# Altium PCB HomeController.PcbDoc (part 2 of 2)
Units mm, origin at the board's own origin, x right, y up, seen from the top; angles counter-clockwise.
Board outline 157.86 x 101.98 mm, 2 copper layers (Top Layer, Bottom Layer); 48 components, 58 nets, 214 pads, 16 vias.
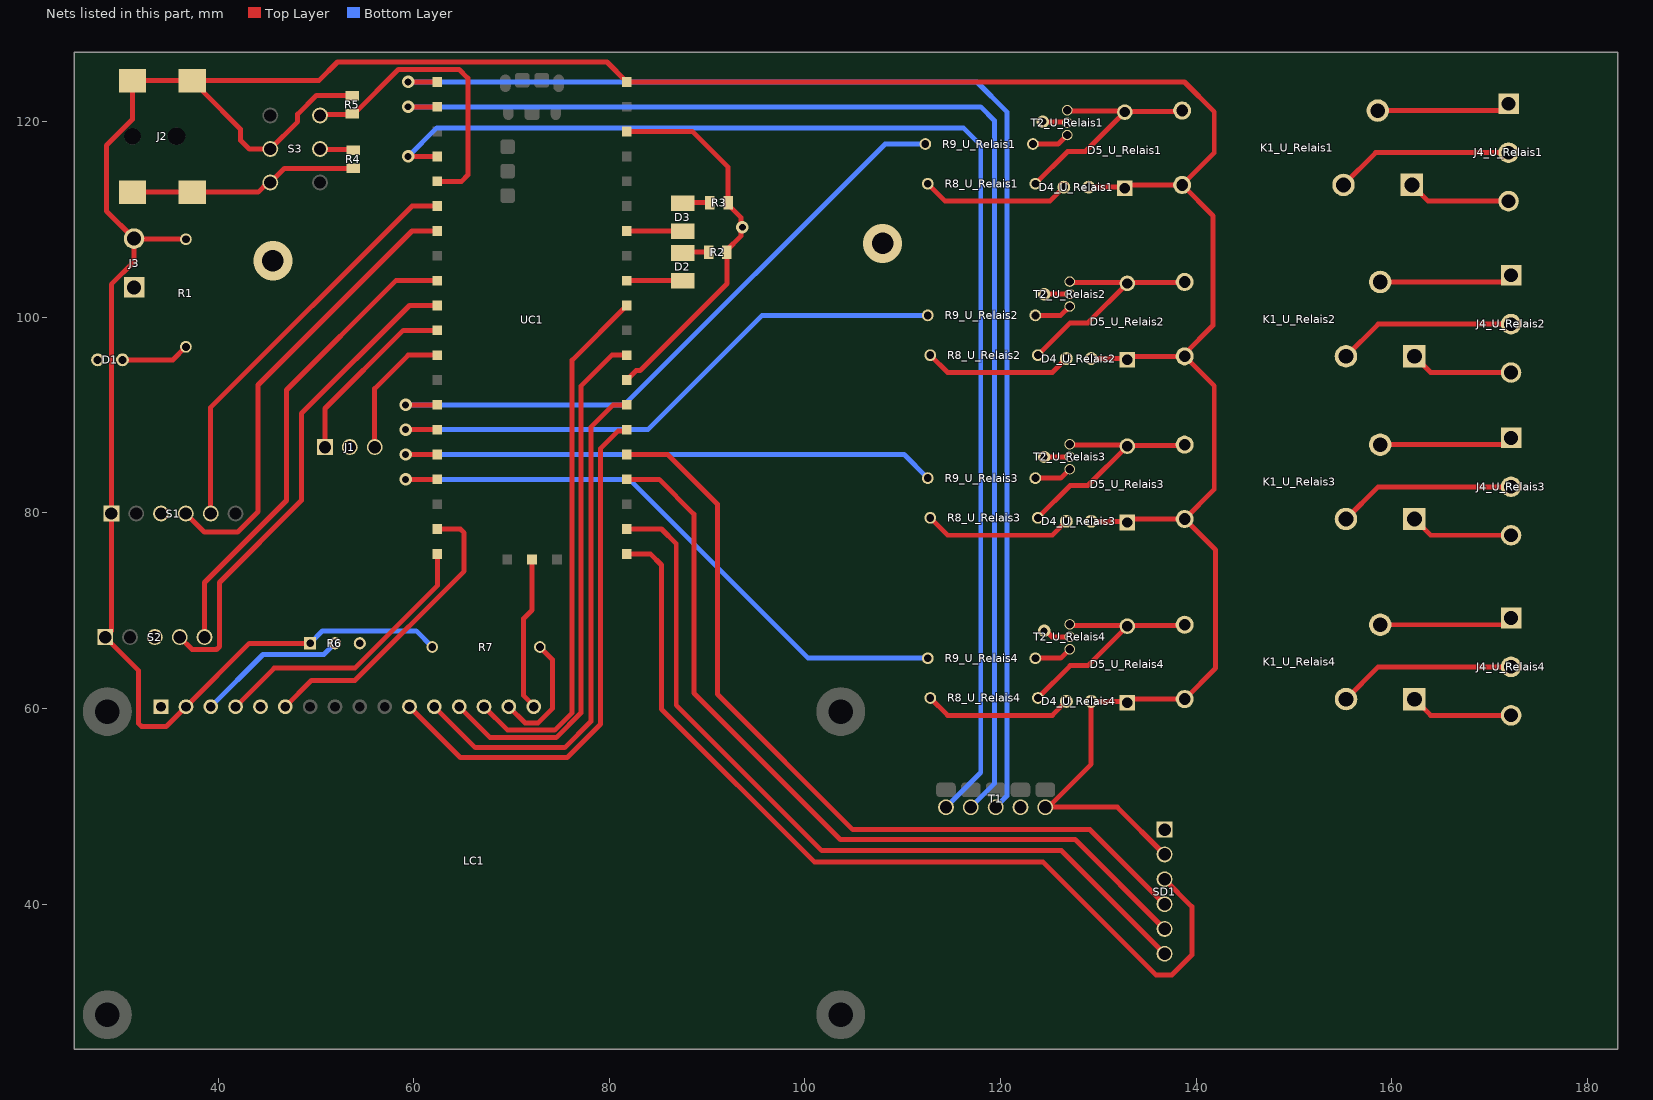
[diagram p2: the nets of this part, all layers, seen from the top]

## Footprints (in the part's own frame and the unit in brackets; to place one, negate y for a bottom-side part, rotate by r counter-clockwise, add the part's x,y. Pads: shape width x height; smd on the part's side, far side on the other; paste and mask are expansions set on the pad) (continued)
Transistor-Footprint-1 [mm]
  round 1.07 hole 0.85 mask+0: 1(-1.3,-0.045) 2(-0.03,-0.045) 3(1.24,-0.045)
  Top Layer region: 1.268,0.704 1.296,0.702 1.324,0.698 1.351,0.693 1.378,0.687 1.405,0.679 1.432,0.669 1.458,0.659 1.483,0.647 1.508,0.633 1.531,0.619 1.554,0.603 1.577,0.586 1.598,0.568 1.618,0.548 1.638,0.528 1.656,0.507 1.673,0.484 1.689,0.461 1.703,0.437 1.717,0.413 1.729,0.388 1.739,0.362 1.749,0.335 1.757,0.308 1.763,0.281 1.768,0.254 1.772,0.226 1.774,0.198 1.775,0.17 1.775,-0.26 1.774,-0.288 1.772,-0.316 1.768,-0.344 1.763,-0.371 1.757,-0.398 1.749,-0.425 1.739,-0.452 1.729,-0.478 1.717,-0.503 1.703,-0.527 1.689,-0.551 1.673,-0.574 1.656,-0.597 1.638,-0.618 1.618,-0.638 1.598,-0.658 1.577,-0.676 1.554,-0.693 1.531,-0.709 1.508,-0.723 1.483,-0.737 1.458,-0.749 1.432,-0.759 1.405,-0.769 1.378,-0.777 1.351,-0.783 1.324,-0.788 1.296,-0.792 1.268,-0.794 1.24,-0.795 1.212,-0.794 1.184,-0.792 1.156,-0.788 1.129,-0.783 1.102,-0.777 1.075,-0.769 1.048,-0.759 1.022,-0.749 0.997,-0.737 0.973,-0.723 0.949,-0.709 0.926,-0.693 0.903,-0.676 0.882,-0.658 0.862,-0.638 0.842,-0.618 0.824,-0.597 0.807,-0.574 0.791,-0.551 0.777,-0.527 0.763,-0.503 0.751,-0.478 0.741,-0.452 0.731,-0.425 0.723,-0.398 0.717,-0.371 0.712,-0.344 0.708,-0.316 0.706,-0.288 0.705,-0.26 0.705,0.17 0.706,0.198 0.708,0.226 0.712,0.254 0.717,0.281 0.723,0.308 0.731,0.335 0.741,0.362 0.751,0.388 0.763,0.413 0.777,0.437 0.791,0.461 0.807,0.484 0.824,0.507 0.842,0.528 0.862,0.548 0.882,0.568 0.903,0.586 0.926,0.603 0.949,0.619 0.973,0.633 0.997,0.647 1.022,0.659 1.048,0.669 1.075,0.679 1.102,0.687 1.129,0.693 1.156,0.698 1.184,0.702 1.212,0.704 1.24,0.705
  Top Layer region: -0.807,0.704 -0.805,0.704 -0.802,0.703 -0.8,0.703 -0.797,0.702 -0.795,0.701 -0.792,0.7 -0.79,0.698 -0.788,0.697 -0.786,0.695 -0.784,0.694 -0.782,0.692 -0.78,0.69 -0.778,0.688 -0.776,0.686 -0.775,0.684 -0.773,0.682 -0.772,0.68 -0.77,0.678 -0.769,0.675 -0.768,0.673 -0.767,0.67 -0.767,0.668 -0.766,0.665 -0.766,0.663 -0.765,0.66 -0.765,0.658 -0.765,0.655 -0.765,-0.745 -0.765,-0.748 -0.765,-0.75 -0.766,-0.753 -0.766,-0.755 -0.767,-0.758 -0.767,-0.76 -0.768,-0.763 -0.769,-0.765 -0.77,-0.768 -0.772,-0.77 -0.773,-0.772 -0.775,-0.774 -0.776,-0.776 -0.778,-0.778 -0.78,-0.78 -0.782,-0.782 -0.784,-0.784 -0.786,-0.785 -0.788,-0.787 -0.79,-0.788 -0.792,-0.79 -0.795,-0.791 -0.797,-0.792 -0.8,-0.793 -0.802,-0.793 -0.805,-0.794 -0.807,-0.794 -0.81,-0.795 -1.79,-0.795 -1.793,-0.794 -1.795,-0.794 -1.798,-0.793 -1.8,-0.793 -1.803,-0.792 -1.805,-0.791 -1.808,-0.79 -1.81,-0.788 -1.812,-0.787 -1.814,-0.785 -1.816,-0.784 -1.818,-0.782 -1.82,-0.78 -1.822,-0.778 -1.824,-0.776 -1.825,-0.774 -1.827,-0.772 -1.828,-0.77 -1.83,-0.768 -1.831,-0.765 -1.832,-0.763 -1.833,-0.76 -1.833,-0.758 -1.834,-0.755 -1.834,-0.753 -1.835,-0.75 -1.835,-0.748 -1.835,-0.745 -1.835,0.655 -1.835,0.658 -1.835,0.66 -1.834,0.663 -1.834,0.665 -1.833,0.668 -1.833,0.67 -1.832,0.673 -1.831,0.675 -1.83,0.678 -1.828,0.68 -1.827,0.682 -1.825,0.684 -1.824,0.686 -1.822,0.688 -1.82,0.69 -1.818,0.692 -1.816,0.694 -1.814,0.695 -1.812,0.697 -1.81,0.698 -1.808,0.7 -1.805,0.701 -1.803,0.702 -1.8,0.703 -1.798,0.703 -1.795,0.704 -1.793,0.704 -1.79,0.705 -0.81,0.705
  Top Layer region: -0.002,0.704 0.026,0.702 0.054,0.698 0.081,0.693 0.108,0.687 0.135,0.679 0.162,0.669 0.188,0.659 0.213,0.647 0.238,0.633 0.261,0.619 0.284,0.603 0.307,0.586 0.328,0.568 0.348,0.548 0.368,0.528 0.386,0.507 0.403,0.484 0.419,0.461 0.433,0.437 0.447,0.413 0.459,0.388 0.469,0.362 0.479,0.335 0.487,0.308 0.493,0.281 0.498,0.254 0.502,0.226 0.504,0.198 0.505,0.17 0.505,-0.26 0.504,-0.288 0.502,-0.316 0.498,-0.344 0.493,-0.371 0.487,-0.398 0.479,-0.425 0.469,-0.452 0.459,-0.478 0.447,-0.503 0.433,-0.527 0.419,-0.551 0.403,-0.574 0.386,-0.597 0.368,-0.618 0.348,-0.638 0.328,-0.658 0.307,-0.676 0.284,-0.693 0.261,-0.709 0.238,-0.723 0.213,-0.737 0.188,-0.749 0.162,-0.759 0.135,-0.769 0.108,-0.777 0.081,-0.783 0.054,-0.788 0.026,-0.792 -0.002,-0.794 -0.03,-0.795 -0.058,-0.794 -0.086,-0.792 -0.114,-0.788 -0.141,-0.783 -0.168,-0.777 -0.195,-0.769 -0.222,-0.759 -0.248,-0.749 -0.273,-0.737 -0.297,-0.723 -0.321,-0.709 -0.344,-0.693 -0.367,-0.676 -0.388,-0.658 -0.408,-0.638 -0.428,-0.618 -0.446,-0.597 -0.463,-0.574 -0.479,-0.551 -0.493,-0.527 -0.507,-0.503 -0.519,-0.478 -0.529,-0.452 -0.539,-0.425 -0.547,-0.398 -0.553,-0.371 -0.558,-0.344 -0.562,-0.316 -0.564,-0.288 -0.565,-0.26 -0.565,0.17 -0.564,0.198 -0.562,0.226 -0.558,0.254 -0.553,0.281 -0.547,0.308 -0.539,0.335 -0.529,0.362 -0.519,0.388 -0.507,0.413 -0.493,0.437 -0.479,0.461 -0.463,0.484 -0.446,0.507 -0.428,0.528 -0.408,0.548 -0.388,0.568 -0.367,0.586 -0.344,0.603 -0.321,0.619 -0.297,0.633 -0.273,0.647 -0.248,0.659 -0.222,0.669 -0.195,0.679 -0.168,0.687 -0.141,0.693 -0.114,0.698 -0.086,0.702 -0.058,0.704 -0.03,0.705
  Bottom Layer region: -0.807,0.704 -0.805,0.704 -0.802,0.703 -0.8,0.703 -0.797,0.702 -0.795,0.701 -0.792,0.7 -0.79,0.698 -0.788,0.697 -0.786,0.695 -0.784,0.694 -0.782,0.692 -0.78,0.69 -0.778,0.688 -0.776,0.686 -0.775,0.684 -0.773,0.682 -0.772,0.68 -0.77,0.678 -0.769,0.675 -0.768,0.673 -0.767,0.67 -0.767,0.668 -0.766,0.665 -0.766,0.663 -0.765,0.66 -0.765,0.658 -0.765,0.655 -0.765,-0.745 -0.765,-0.748 -0.765,-0.75 -0.766,-0.753 -0.766,-0.755 -0.767,-0.758 -0.767,-0.76 -0.768,-0.763 -0.769,-0.765 -0.77,-0.768 -0.772,-0.77 -0.773,-0.772 -0.775,-0.774 -0.776,-0.776 -0.778,-0.778 -0.78,-0.78 -0.782,-0.782 -0.784,-0.784 -0.786,-0.785 -0.788,-0.787 -0.79,-0.788 -0.792,-0.79 -0.795,-0.791 -0.797,-0.792 -0.8,-0.793 -0.802,-0.793 -0.805,-0.794 -0.807,-0.794 -0.81,-0.795 -1.79,-0.795 -1.793,-0.794 -1.795,-0.794 -1.798,-0.793 -1.8,-0.793 -1.803,-0.792 -1.805,-0.791 -1.808,-0.79 -1.81,-0.788 -1.812,-0.787 -1.814,-0.785 -1.816,-0.784 -1.818,-0.782 -1.82,-0.78 -1.822,-0.778 -1.824,-0.776 -1.825,-0.774 -1.827,-0.772 -1.828,-0.77 -1.83,-0.768 -1.831,-0.765 -1.832,-0.763 -1.833,-0.76 -1.833,-0.758 -1.834,-0.755 -1.834,-0.753 -1.835,-0.75 -1.835,-0.748 -1.835,-0.745 -1.835,0.655 -1.835,0.658 -1.835,0.66 -1.834,0.663 -1.834,0.665 -1.833,0.668 -1.833,0.67 -1.832,0.673 -1.831,0.675 -1.83,0.678 -1.828,0.68 -1.827,0.682 -1.825,0.684 -1.824,0.686 -1.822,0.688 -1.82,0.69 -1.818,0.692 -1.816,0.694 -1.814,0.695 -1.812,0.697 -1.81,0.698 -1.808,0.7 -1.805,0.701 -1.803,0.702 -1.8,0.703 -1.798,0.703 -1.795,0.704 -1.793,0.704 -1.79,0.705 -0.81,0.705
  Bottom Layer region: -0.002,0.704 0.026,0.702 0.054,0.698 0.081,0.693 0.108,0.687 0.135,0.679 0.162,0.669 0.188,0.659 0.213,0.647 0.238,0.633 0.261,0.619 0.284,0.603 0.307,0.586 0.328,0.568 0.348,0.548 0.368,0.528 0.386,0.507 0.403,0.484 0.419,0.461 0.433,0.437 0.447,0.413 0.459,0.388 0.469,0.362 0.479,0.335 0.487,0.308 0.493,0.281 0.498,0.254 0.502,0.226 0.504,0.198 0.505,0.17 0.505,-0.26 0.504,-0.288 0.502,-0.316 0.498,-0.344 0.493,-0.371 0.487,-0.398 0.479,-0.425 0.469,-0.452 0.459,-0.478 0.447,-0.503 0.433,-0.527 0.419,-0.551 0.403,-0.574 0.386,-0.597 0.368,-0.618 0.348,-0.638 0.328,-0.658 0.307,-0.676 0.284,-0.693 0.261,-0.709 0.238,-0.723 0.213,-0.737 0.188,-0.749 0.162,-0.759 0.135,-0.769 0.108,-0.777 0.081,-0.783 0.054,-0.788 0.026,-0.792 -0.002,-0.794 -0.03,-0.795 -0.058,-0.794 -0.086,-0.792 -0.114,-0.788 -0.141,-0.783 -0.168,-0.777 -0.195,-0.769 -0.222,-0.759 -0.248,-0.749 -0.273,-0.737 -0.297,-0.723 -0.321,-0.709 -0.344,-0.693 -0.367,-0.676 -0.388,-0.658 -0.408,-0.638 -0.428,-0.618 -0.446,-0.597 -0.463,-0.574 -0.479,-0.551 -0.493,-0.527 -0.507,-0.503 -0.519,-0.478 -0.529,-0.452 -0.539,-0.425 -0.547,-0.398 -0.553,-0.371 -0.558,-0.344 -0.562,-0.316 -0.564,-0.288 -0.565,-0.26 -0.565,0.17 -0.564,0.198 -0.562,0.226 -0.558,0.254 -0.553,0.281 -0.547,0.308 -0.539,0.335 -0.529,0.362 -0.519,0.388 -0.507,0.413 -0.493,0.437 -0.479,0.461 -0.463,0.484 -0.446,0.507 -0.428,0.528 -0.408,0.548 -0.388,0.568 -0.367,0.586 -0.344,0.603 -0.321,0.619 -0.297,0.633 -0.273,0.647 -0.248,0.659 -0.222,0.669 -0.195,0.679 -0.168,0.687 -0.141,0.693 -0.114,0.698 -0.086,0.702 -0.058,0.704 -0.03,0.705
  Bottom Layer region: 1.268,0.704 1.296,0.702 1.324,0.698 1.351,0.693 1.378,0.687 1.405,0.679 1.432,0.669 1.458,0.659 1.483,0.647 1.508,0.633 1.531,0.619 1.554,0.603 1.577,0.586 1.598,0.568 1.618,0.548 1.638,0.528 1.656,0.507 1.673,0.484 1.689,0.461 1.703,0.437 1.717,0.413 1.729,0.388 1.739,0.362 1.749,0.335 1.757,0.308 1.763,0.281 1.768,0.254 1.772,0.226 1.774,0.198 1.775,0.17 1.775,-0.26 1.774,-0.288 1.772,-0.316 1.768,-0.344 1.763,-0.371 1.757,-0.398 1.749,-0.425 1.739,-0.452 1.729,-0.478 1.717,-0.503 1.703,-0.527 1.689,-0.551 1.673,-0.574 1.656,-0.597 1.638,-0.618 1.618,-0.638 1.598,-0.658 1.577,-0.676 1.554,-0.693 1.531,-0.709 1.508,-0.723 1.483,-0.737 1.458,-0.749 1.432,-0.759 1.405,-0.769 1.378,-0.777 1.351,-0.783 1.324,-0.788 1.296,-0.792 1.268,-0.794 1.24,-0.795 1.212,-0.794 1.184,-0.792 1.156,-0.788 1.129,-0.783 1.102,-0.777 1.075,-0.769 1.048,-0.759 1.022,-0.749 0.997,-0.737 0.973,-0.723 0.949,-0.709 0.926,-0.693 0.903,-0.676 0.882,-0.658 0.862,-0.638 0.842,-0.618 0.824,-0.597 0.807,-0.574 0.791,-0.551 0.777,-0.527 0.763,-0.503 0.751,-0.478 0.741,-0.452 0.731,-0.425 0.723,-0.398 0.717,-0.371 0.712,-0.344 0.708,-0.316 0.706,-0.288 0.705,-0.26 0.705,0.17 0.706,0.198 0.708,0.226 0.712,0.254 0.717,0.281 0.723,0.308 0.731,0.335 0.741,0.362 0.751,0.388 0.763,0.413 0.777,0.437 0.791,0.461 0.807,0.484 0.824,0.507 0.842,0.528 0.862,0.548 0.882,0.568 0.903,0.586 0.926,0.603 0.949,0.619 0.973,0.633 0.997,0.647 1.022,0.659 1.048,0.669 1.075,0.679 1.102,0.687 1.129,0.693 1.156,0.698 1.184,0.702 1.212,0.704 1.24,0.705
  silkscreen extent -3.14,-1.15 2.23,2.41, body extent -2.63,-1.51 2.57,2.68, height 6.33
TSL2591-Footprint-1 [mm]
  round 1.62 hole 1.27: 3V3(-3.688,-0.065) GND(-1.148,-0.065) INT(6.472,-0.065) SCL(1.392,-0.065) SDA(3.932,-0.065)
  rect 1.62x1.62 hole 1.27: VIN(-6.228,-0.065)
  silkscreen extent -8.38,-1.52 8.25,10.54

## Part data
D1 D4_U_Relais1 D4_U_Relais2 D4_U_Relais3 D4_U_Relais4: library part CMP-00001-2, "3mm LED"
D2 D3: library part CMP-00018-2, "Generic SMD LED"
D5_U_Relais1 D5_U_Relais2 D5_U_Relais3 D5_U_Relais4: library part CMP-00008-1, "Generic Diode"
J1: library part CMP-00026-2, "A Connector for the Debug Probe"
J2: library part CMP-00004-1, "SMD Barrel Plug"
J3: library part CMP-00011-1, "2 Pin"
J4_U_Relais1 J4_U_Relais2 J4_U_Relais3 J4_U_Relais4: library part CMP-00012-1, "3 Pin"
K1_U_Relais1 K1_U_Relais2 K1_U_Relais3 K1_U_Relais4: library part CMP-00036-3, "Power/Signal Relay, SPDT, Momentary, 0.108A (Coil), 5VDC (Coil), 540mW (Coil), 16A (Contact), 30VDC (Contact), DC Input, AC/DC Output, Through Hole-Straight Mount"
LC1: library part CMP-00030-2, "16x2 LCD Display"
R1: library part Resistor
R2 R3 R4 R5: library part CMP-00019-2, "Generic SMD Resistor"
R6: library part CMP-00013-1, "Generic Potentiometer"
R7 R8_U_Relais1 R8_U_Relais2 R8_U_Relais3 R8_U_Relais4 R9_U_Relais1 R9_U_Relais2 R9_U_Relais3 R9_U_Relais4: library part CMP-00014-2, "Generic Resistor"
S1: library part CMP-00037-1, "Adafruit High Dynamic Range Digital Light Sensor"
S2: library part CMP-00038-1, "Adafruit Si7021 Temperature & Humidity Sensor"
S3: library part CMP-00006-1, "6 Pin with LED"
SD1: library part CMP-00032-2, "SD Card Break Out Board"
T1: library part CMP-00027-2, "UART Telemetry Antenna"
T2_U_Relais1 T2_U_Relais2 T2_U_Relais3 T2_U_Relais4: library part CMP-00000-1, "Generic Transistor"

## Via types
v1: diameter 1.27, hole 0.711, Top Layer to Bottom Layer, 12 vias
v2: diameter 4, hole 2.2, Top Layer to Bottom Layer, 4 vias

## Nets (pads, with @x,y where several pads share a name; then routed paths per layer and width w, separated by ;. In a path a pad name is that pad's centre, name@x,y a point inside that pad or via, vN(x,y) a via of type N, cw(c..) or ccw(c..) an arc to the next point about the centre after c; other vN are vias at no path point)
+5: D4_U_Relais1.A D4_U_Relais2.A D4_U_Relais3.A D4_U_Relais4.A D5_U_Relais1.K D5_U_Relais2.K D5_U_Relais3.K D5_U_Relais4.K J2.1A J2.1B J3.2 K1_U_Relais1.3 K1_U_Relais2.3 K1_U_Relais3.3 K1_U_Relais4.3 LC1.2 R1.1 R5.1 R6.1 R7.1 S1.VIN S2.VIN S3.A SD1.VCC T1.VCC UC1.40 | length 381.9
  Top Layer w0.508: R1.1@36.703,107.989 36.667,108.025 31.436,108.025 J3.2@31.4,108.061 ; R6.1@49.407,66.675 43.186,66.675 LC1.2@36.707,60.196 34.677,58.166 32.175,58.166 31.877,58.464 31.877,63.881 S2.VIN@28.448,67.31 29.078,67.94 S1.VIN@29.078,79.945 29.078,103.377 31.4,105.7 J3.2@31.4,108.061 ; R5.1@53.7,122.688 50.044,122.688 48.133,120.777 48.133,120.015 S3.A@45.339,117.221 43.18,117.221 42.291,118.11 42.291,119.253 38.484,123.06 38.484,123.26 J2.1A@37.538,124.206 ; T1.VCC@124.587,49.911 T1.VCC@124.878,49.911 ; D4_U_Relais1.A@129.019,113.316 132.585,113.316 D5_U_Relais1.K@132.712,113.189 133.071,113.548 K1_U_Relais1.3@138.577,113.548 ; D4_U_Relais3.A@129.273,79.153 132.839,79.153 D5_U_Relais3.K@132.966,79.026 133.325,79.385 K1_U_Relais3.3@138.831,79.385 ; D4_U_Relais2.A@129.273,95.79 132.839,95.79 D5_U_Relais2.K@132.966,95.663 133.325,96.022 K1_U_Relais2.3@138.831,96.022 ; SD1.VCC@136.779,45.085 131.953,49.911 T1.VCC@124.878,49.911 ; J3.2@31.4,108.061 28.575,110.887 28.575,117.584 31.238,120.247 J2.1B@31.238,124.206 J2.1A@37.338,124.206 J2.1A@37.538,124.206 ; J2.1A@37.538,124.206 50.294,124.206 52.199,126.111 79.756,126.111 UC1.40@81.788,124.079 138.811,124.079 141.859,121.031 141.859,116.83 K1_U_Relais1.3@138.577,113.548 ; T1.VCC@124.878,49.911 129.276,54.309 D4_U_Relais4.A@129.276,60.738 132.842,60.738 D5_U_Relais4.K@132.969,60.611 133.328,60.97 K1_U_Relais4.3@138.834,60.97 141.986,64.122 141.986,76.23 K1_U_Relais3.3@138.831,79.385 ; K1_U_Relais1.3@138.577,113.548 141.732,110.393 141.732,99.187 138.831,96.286 K1_U_Relais2.3@138.831,96.022 ; K1_U_Relais3.3@138.831,79.385 141.859,82.413 141.859,92.994 K1_U_Relais2.3@138.831,96.022
  Bottom Layer w0.508: R6.1@49.407,66.675 50.677,67.945 60.247,67.945 R7.1@61.898,66.294
GND: D1.K J1.GND J2.2 J2.3 J3.1 LC1.1 LC1.5 LC1.16 R2.2 R3.2 R4.2 R6.3 S1.GND S2.GND S3.3 SD1.GND T1.GND T2_U_Relais1.2 T2_U_Relais2.2 T2_U_Relais3.2 T2_U_Relais4.2 UC1.28 UC1.38 UC1.D2 | length 89.5
  Top Layer w0.508: J2.2@31.238,112.806 J2.3@37.338,112.806 44.102,112.806 45.088,113.792 S3.3@45.339,113.792 46.787,115.24 R4.2@53.827,115.24 ; UC1.D2@72.098,75.249 72.098,70.058 71.247,69.207 71.247,61.32 72.267,60.3 LC1.16@72.267,60.196 ; UC1.28@81.788,93.599 82.752,94.563 83.151,94.563 92.03,103.442 R2.2@92.03,106.68 92.03,106.885 93.453,108.308 93.453,109.074 v1(93.599,109.22) 93.453,109.366 93.453,110.232 92.151,111.534 R3.2@92.151,111.739 92.151,115.367 88.519,118.999 UC1.38@81.788,118.999 ; v1(124.333,120.015) 124.381,119.967 126.777,119.967 T2_U_Relais1.2@126.825,119.918 ; v1(124.46,67.945) 124.666,67.945 125.271,67.34 T2_U_Relais4.2@127.082,67.34 ; v1(124.46,85.725) 124.475,85.74 127.064,85.74 T2_U_Relais3.2@127.079,85.755 ; v1(124.46,102.362) 124.475,102.377 127.064,102.377 T2_U_Relais2.2@127.079,102.392
  other v2: 45.593,105.791 107.95,107.569
NetD1_A: D1.A R1.2 | length 7
  Top Layer w0.508: D1.A@30.216,95.663 35.377,95.663 R1.2@36.703,96.989
NetD2_A: D2.A UC1.32 | length 5.7
  Top Layer w0.508: UC1.32@81.788,103.759 87.475,103.759 D2.A@87.503,103.731
NetD2_K: D2.K R2.1 | length 2.7
  Top Layer w0.508: D2.K@87.503,106.581 87.602,106.68 R2.1@90.17,106.68
NetD3_A: D3.A UC1.34 | length 5.7
  Top Layer w0.508: UC1.34@81.788,108.839 87.475,108.839 D3.A@87.503,108.811
NetD3_K: D3.K R3.1 | length 2.8
  Top Layer w0.508: D3.K@87.503,111.661 87.581,111.739 R3.1@90.291,111.739
NetD4_U_Relais1_K: D4_U_Relais1.K R8_U_Relais1.2 | length 15.2
  Top Layer w0.508: R8_U_Relais1.2@112.568,113.665 114.346,111.887 125.05,111.887 D4_U_Relais1.K@126.479,113.316
NetD4_U_Relais2_K: D4_U_Relais2.K R8_U_Relais2.2 | length 15.2
  Top Layer w0.508: R8_U_Relais2.2@112.822,96.139 114.6,94.361 125.304,94.361 D4_U_Relais2.K@126.733,95.79
NetD4_U_Relais3_K: D4_U_Relais3.K R8_U_Relais3.2 | length 15.2
  Top Layer w0.508: R8_U_Relais3.2@112.822,79.502 114.6,77.724 125.304,77.724 D4_U_Relais3.K@126.733,79.153
NetD4_U_Relais4_K: D4_U_Relais4.K R8_U_Relais4.2 | length 15.2
  Top Layer w0.508: R8_U_Relais4.2@112.825,61.087 114.603,59.309 125.307,59.309 D4_U_Relais4.K@126.736,60.738
NetD5_U_Relais1_A: D5_U_Relais1.A K1_U_Relais1.5 R8_U_Relais1.1 T2_U_Relais1.1 | length 24.1
  Top Layer w0.508: R8_U_Relais1.1@123.568,113.665 126.87,116.967 128.68,116.967 D5_U_Relais1.A@132.712,120.999 ; T2_U_Relais1.1@126.825,121.188 126.92,121.093 132.617,121.093 D5_U_Relais1.A@132.712,120.999 ; K1_U_Relais1.5@138.577,121.148 138.502,121.073 132.787,121.073 D5_U_Relais1.A@132.712,120.999
NetD5_U_Relais2_A: D5_U_Relais2.A K1_U_Relais2.5 R8_U_Relais2.1 T2_U_Relais2.1 | length 24.1
  Top Layer w0.508: R8_U_Relais2.1@123.822,96.139 127.124,99.441 128.934,99.441 D5_U_Relais2.A@132.966,103.473 ; T2_U_Relais2.1@127.079,103.662 127.174,103.567 132.871,103.567 D5_U_Relais2.A@132.966,103.473 ; K1_U_Relais2.5@138.831,103.622 138.756,103.547 133.041,103.547 D5_U_Relais2.A@132.966,103.473
NetD5_U_Relais3_A: D5_U_Relais3.A K1_U_Relais3.5 R8_U_Relais3.1 T2_U_Relais3.1 | length 24.1
  Top Layer w0.508: R8_U_Relais3.1@123.822,79.502 127.124,82.804 128.934,82.804 D5_U_Relais3.A@132.966,86.836 ; T2_U_Relais3.1@127.079,87.025 127.174,86.93 132.871,86.93 D5_U_Relais3.A@132.966,86.836 ; K1_U_Relais3.5@138.831,86.985 138.756,86.91 133.041,86.91 D5_U_Relais3.A@132.966,86.836
NetD5_U_Relais4_A: D5_U_Relais4.A K1_U_Relais4.5 R8_U_Relais4.1 T2_U_Relais4.1 | length 24.1
  Top Layer w0.508: R8_U_Relais4.1@123.825,61.087 127.127,64.389 128.937,64.389 D5_U_Relais4.A@132.969,68.421 ; T2_U_Relais4.1@127.082,68.61 127.177,68.515 132.874,68.515 D5_U_Relais4.A@132.969,68.421 ; K1_U_Relais4.5@138.834,68.57 138.759,68.495 133.044,68.495 D5_U_Relais4.A@132.969,68.421
NetJ1_RX: J1.RX UC1.12 | length 13.8
  Top Layer w0.508: J1.RX@56.007,86.741 56.007,92.71 59.436,96.139 UC1.12@62.408,96.139
NetJ1_TX: J1.TX UC1.11 | length 18.7
  Top Layer w0.508: J1.TX@50.927,86.741 50.927,90.678 58.928,98.679 UC1.11@62.408,98.679
NetJ4_U_Relais1_1: J4_U_Relais1.1 K1_U_Relais1.4 | length 13.7
  Top Layer w0.508: K1_U_Relais1.4@158.577,121.148 171.263,121.148 J4_U_Relais1.1@171.955,121.84
NetJ4_U_Relais1_2: J4_U_Relais1.2 K1_U_Relais1.2 | length 18.2
  Top Layer w0.508: K1_U_Relais1.2@155.077,113.548 158.369,116.84 J4_U_Relais1.2@171.955,116.84
NetJ4_U_Relais1_3: J4_U_Relais1.3 K1_U_Relais1.1 | length 10.6
  Top Layer w0.508: K1_U_Relais1.1@162.077,113.548 163.738,111.887 J4_U_Relais1.3@171.955,111.887
NetJ4_U_Relais2_1: J4_U_Relais2.1 K1_U_Relais2.4 | length 13.7
  Top Layer w0.508: K1_U_Relais2.4@158.831,103.622 171.517,103.622 J4_U_Relais2.1@172.209,104.314
NetJ4_U_Relais2_2: J4_U_Relais2.2 K1_U_Relais2.2 | length 18.2
  Top Layer w0.508: K1_U_Relais2.2@155.331,96.022 158.623,99.314 J4_U_Relais2.2@172.209,99.314
NetJ4_U_Relais2_3: J4_U_Relais2.3 K1_U_Relais2.1 | length 10.6
  Top Layer w0.508: K1_U_Relais2.1@162.331,96.022 163.992,94.361 J4_U_Relais2.3@172.209,94.361
NetJ4_U_Relais3_1: J4_U_Relais3.1 K1_U_Relais3.4 | length 13.7
  Top Layer w0.508: K1_U_Relais3.4@158.831,86.985 171.517,86.985 J4_U_Relais3.1@172.209,87.677
NetJ4_U_Relais3_2: J4_U_Relais3.2 K1_U_Relais3.2 | length 18.2
  Top Layer w0.508: K1_U_Relais3.2@155.331,79.385 158.623,82.677 J4_U_Relais3.2@172.209,82.677
NetJ4_U_Relais3_3: J4_U_Relais3.3 K1_U_Relais3.1 | length 10.6
  Top Layer w0.508: K1_U_Relais3.1@162.331,79.385 163.992,77.724 J4_U_Relais3.3@172.209,77.724
NetJ4_U_Relais4_1: J4_U_Relais4.1 K1_U_Relais4.4 | length 13.7
  Top Layer w0.508: K1_U_Relais4.4@158.834,68.57 171.52,68.57 J4_U_Relais4.1@172.212,69.262
NetJ4_U_Relais4_2: J4_U_Relais4.2 K1_U_Relais4.2 | length 18.2
  Top Layer w0.508: K1_U_Relais4.2@155.334,60.97 158.626,64.262 J4_U_Relais4.2@172.212,64.262
NetJ4_U_Relais4_3: J4_U_Relais4.3 K1_U_Relais4.1 | length 10.6
  Top Layer w0.508: K1_U_Relais4.1@162.334,60.97 163.995,59.309 J4_U_Relais4.3@172.212,59.309
NetLC1_3: LC1.3 R6.2 | length 15.4
  Bottom Layer w0.508: LC1.3@39.247,60.196 44.583,65.532 50.804,65.532 R6.2@51.947,66.675
NetLC1_4: LC1.4 UC1.20 | length 29
  Top Layer w0.508: LC1.4@41.787,60.196 45.726,64.135 53.975,64.135 62.408,72.568 UC1.20@62.408,75.819
NetLC1_6: LC1.6 UC1.19 | length 30.9
  Top Layer w0.508: LC1.6@46.867,60.196 49.536,62.865 53.975,62.865 65.151,74.041 65.151,77.978 64.77,78.359 UC1.19@62.408,78.359
NetLC1_11: LC1.11 UC1.26 | length 54.8
  Top Layer w0.508: LC1.11@59.567,60.196 64.772,54.991 75.692,54.991 79.121,58.42 79.121,86.614 80.876,88.369 81.638,88.369 UC1.26@81.788,88.519
NetLC1_12: LC1.12 UC1.27 | length 53.6
  Top Layer w0.508: LC1.12@62.107,60.196 66.296,56.007 75.438,56.007 78.105,58.674 78.105,88.773 80.391,91.059 UC1.27@81.788,91.059
NetLC1_13: LC1.13 UC1.29 | length 54.2
  Top Layer w0.508: LC1.13@64.647,60.196 67.82,57.023 74.558,57.023 77.089,59.554 77.089,92.964 80.264,96.139 UC1.29@81.788,96.139
NetLC1_14: LC1.14 UC1.31 | length 54.7
  Top Layer w0.508: LC1.14@67.187,60.196 69.598,57.785 74.422,57.785 76.2,59.563 76.2,95.631 UC1.31@81.788,101.219
NetLC1_15: LC1.15 R7.2 | length 12.6
  Top Layer w0.508: LC1.15@69.727,60.196 71.376,58.547 72.727,58.547 74.168,59.988 74.168,65.024 R7.2@72.898,66.294
NetR4_1: R4.1 S3.K | length 3.5
  Top Layer w0.508: S3.K@50.419,117.221 50.48,117.16 53.767,117.16 R4.1@53.827,117.1
NetR5_2: R5.2 S3.2 UC1.5 | length 30.7
  Top Layer w0.508: S3.2@50.419,120.65 50.508,120.739 53.611,120.739 R5.2@53.7,120.828 53.905,120.828 58.427,125.349 64.643,125.349 65.532,124.46 65.532,114.554 64.897,113.919 UC1.5@62.408,113.919
NetR9_U_Relais1_1: R9_U_Relais1.1 UC1.14 | length 67.4
  Top Layer w0.508: v1(59.182,91.059) UC1.14@62.408,91.059
  Bottom Layer w0.508: v1(59.182,91.059) 81.534,91.059 108.204,117.729 R9_U_Relais1.1@112.314,117.729
NetR9_U_Relais1_2: R9_U_Relais1.2 T2_U_Relais1.3 | length 3.9
  Top Layer w0.508: R9_U_Relais1.2@123.314,117.729 125.905,117.729 T2_U_Relais1.3@126.825,118.648
NetR9_U_Relais2_1: R9_U_Relais2.1 UC1.15 | length 61.5
  Top Layer w0.508: v1(59.182,88.519) UC1.15@62.408,88.519
  Bottom Layer w0.508: v1(59.182,88.519) 83.947,88.519 95.631,100.203 R9_U_Relais2.1@112.568,100.203
NetR9_U_Relais2_2: R9_U_Relais2.2 T2_U_Relais2.3 | length 3.9
  Top Layer w0.508: R9_U_Relais2.2@123.568,100.203 126.159,100.203 T2_U_Relais2.3@127.079,101.122
NetR9_U_Relais3_1: R9_U_Relais3.1 UC1.16 | length 57.6
  Top Layer w0.508: v1(59.182,85.979) UC1.16@62.408,85.979
  Bottom Layer w0.508: v1(59.182,85.979) 110.155,85.979 R9_U_Relais3.1@112.568,83.566
NetR9_U_Relais3_2: R9_U_Relais3.2 T2_U_Relais3.3 | length 3.9
  Top Layer w0.508: R9_U_Relais3.2@123.568,83.566 126.159,83.566 T2_U_Relais3.3@127.079,84.485
NetR9_U_Relais4_1: R9_U_Relais4.1 UC1.17 | length 64.2
  Top Layer w0.508: v1(59.182,83.439) UC1.17@62.408,83.439
  Bottom Layer w0.508: v1(59.182,83.439) 82.042,83.439 100.33,65.151 R9_U_Relais4.1@112.571,65.151
NetR9_U_Relais4_2: R9_U_Relais4.2 T2_U_Relais4.3 | length 3.9
  Top Layer w0.508: R9_U_Relais4.2@123.571,65.151 126.162,65.151 T2_U_Relais4.3@127.082,66.07
NetS1_SCL: S1.SCL UC1.7 | length 46.8
  Top Layer w0.508: S1.SCL@36.698,79.945 38.582,78.061 41.993,78.061 44.069,80.137 44.069,93.091 59.817,108.839 UC1.7@62.408,108.839
NetS1_SDA: S1.SDA UC1.6 | length 42.5
  Top Layer w0.508: S1.SDA@39.238,79.945 39.238,90.8 59.817,111.379 UC1.6@62.408,111.379
NetS2_SCL: S2.SCL UC1.10 | length 50.5
  Top Layer w0.508: S2.SCL@36.068,67.31 37.338,66.04 39.834,66.04 40.132,66.338 40.132,72.898 48.514,81.28 48.514,90.17 59.563,101.219 UC1.10@62.408,101.219
NetS2_SDA: S2.SDA UC1.9 | length 48.8
  Top Layer w0.508: S2.SDA@38.608,67.31 38.608,72.898 46.99,81.28 46.99,92.583 58.166,103.759 UC1.9@62.408,103.759
NetSD1_CS: SD1.CS UC1.22 | length 82.7
  Top Layer w0.508: UC1.22@81.788,78.359 85.344,78.359 86.846,76.857 86.846,60.347 101.727,45.466 126.238,45.466 SD1.CS@136.779,34.925
NetSD1_MISO: SD1.MISO UC1.21 | length 94
  Top Layer w0.508: UC1.21@81.788,75.819 84.201,75.819 85.344,74.676 85.344,59.944 100.965,44.323 124.333,44.323 135.89,32.766 137.541,32.766 139.573,34.798 139.573,39.751 SD1.MISO@136.779,42.545
NetSD1_MOSI: SD1.MOSI UC1.25 | length 85.4
  Top Layer w0.508: UC1.25@81.788,85.979 85.979,85.979 91.059,80.899 91.059,61.468 104.902,47.625 129.159,47.625 SD1.MOSI@136.779,40.005
NetSD1_SCK: SD1.SCK UC1.24 | length 84.7
  Top Layer w0.508: UC1.24@81.788,83.439 85.09,83.439 88.646,79.883 88.646,61.595 103.632,46.609 127.635,46.609 SD1.SCK@136.779,37.465
NetT1_RXD: T1.RXD UC1.1 | length 137
  Top Layer w0.508: v1(59.436,124.079) UC1.1@62.408,124.079
  Bottom Layer w0.508: v1(59.436,124.079) 117.602,124.079 120.65,121.031 120.65,51.054 T1.RXD@119.507,49.911
NetT1_SET: T1.SET UC1.4 | length 132.6
  Top Layer w0.508: v1(59.436,116.459) UC1.4@62.408,116.459
  Bottom Layer w0.508: v1(59.436,116.459) 62.357,119.38 116.205,119.38 117.983,117.602 117.983,53.467 T1.SET@114.427,49.911
NetT1_TXD: T1.TXD UC1.2 | length 134.7
  Top Layer w0.508: v1(59.436,121.539) UC1.2@62.408,121.539
  Bottom Layer w0.508: v1(59.436,121.539) 117.983,121.539 119.38,120.142 119.38,52.324 T1.TXD@116.967,49.911
pads on no net: J2.None_01 J2.None_02 LC1.7 LC1.8 LC1.9 LC1.10 LC1.S1 LC1.S2 LC1.S3 LC1.S4 S1.3V3 S1.INT S2.3V3 S3.1 S3.4 T1.GND_ T1.RXD_ T1.SET_ T1.TXD_ T1.VCC_ UC1.3 UC1.8 UC1.13 UC1.18 UC1.23 UC1.30 UC1.33 UC1.35 UC1.36 UC1.37 UC1.39 UC1.A UC1.B UC1.C UC1.D UC1.D1 UC1.D3 UC1.TP1 UC1.TP2 UC1.TP3 UC1.TP4 UC1.TP5 UC1.TP6
copper on no net:
  other v2: 180.34,27.94 179.451,123.952

## Polygon pours and split planes (outlines as drawn)
GND on Bottom Layer "GND_L02_P000" (solid, pour order 0): 25.527,127 25.4,126.873 25.4,25.273 147.574,25.273 147.574,127

## Silkscreen, mask and mechanical layers (free items; w line width, h text height)
Top Overlay:
  text "Home Controller" at 86.868,122.428 h1.52
  text "IN" at 177.419,121.158 h1.52
  text "Version 1.0" at 86.741,120.015 h1.52
  text "5V" at 39.37,109.093 h1.52 r270
  text "GND" at 39.37,104.521 h1.52 r270
  text "IN" at 177.165,103.632 h1.52
  text "IN" at 177.165,87.122 h1.52
  text "IN" at 177.165,68.707 h1.52

## Text inside footprints (layer, text, board x,y; h text height)
J1: Top Overlay "GND" at 54.102,82.423 h1.02 r90; Top Overlay "RX" at 56.6,83.439 h1.02 r90; Top Overlay "TX" at 51.308,83.439 h1.02 r90; Top Overlay "Debug" at 51.181,88.35 h1.02
S1: Top Overlay "Sensor" at 33.274,86.741 h1.02; Top Overlay "Digital Light" at 29.337,88.731 h1.02; Top Overlay "VIN" at 29.591,81.788 h1.02 r90; Top Overlay "3V3" at 32.131,81.788 h1.02 r90; Top Overlay "GND" at 34.798,81.788 h1.02 r90; Top Overlay "SCL" at 37.338,81.788 h1.02 r90; Top Overlay "SDA" at 39.878,81.788 h1.02 r90; Top Overlay "INT" at 42.418,81.788 h1.02 r90
S2: Top Overlay "VIN" at 29.093,69.094 h1.02 r90; Top Overlay "3V3" at 31.701,69.098 h1.02 r90; Top Overlay "GND" at 34.114,69.098 h1.02 r90; Top Overlay "SCL" at 36.781,69.098 h1.02 r90; Top Overlay "SDA" at 39.194,68.971 h1.02 r90; Top Overlay "Temp & Humid" at 28.204,73.75 h1.02
SD1: Top Overlay "CS" at 138.049,34.375 h1.02; Top Overlay "SCK" at 138.049,36.915 h1.02; Top Overlay "MOSI" at 138.049,39.455 h1.02; Top Overlay "MISO" at 138.049,41.995 h1.02; Top Overlay "VCC" at 138.049,44.535 h1.02; Top Overlay "GND" at 138.049,47.075 h1.02; Top Overlay "MicroSD Card Adapter" at 145.796,40.513 h1.52